# Altium PCB SJA1105Q_LAN8870_EVB_revA.PcbDoc (part 3 of 5)
Units mm, origin at the board's own origin, x right, y up, seen from the top; angles counter-clockwise.
Board outline 128 x 110 mm, 6 copper layers (Top Layer, Mid Layer 1, Mid Layer 2, Mid Layer 3, Mid Layer 4, Bottom Layer), stack 1.538 mm thick; 490 components, 327 nets, 1659 pads, 519 vias.
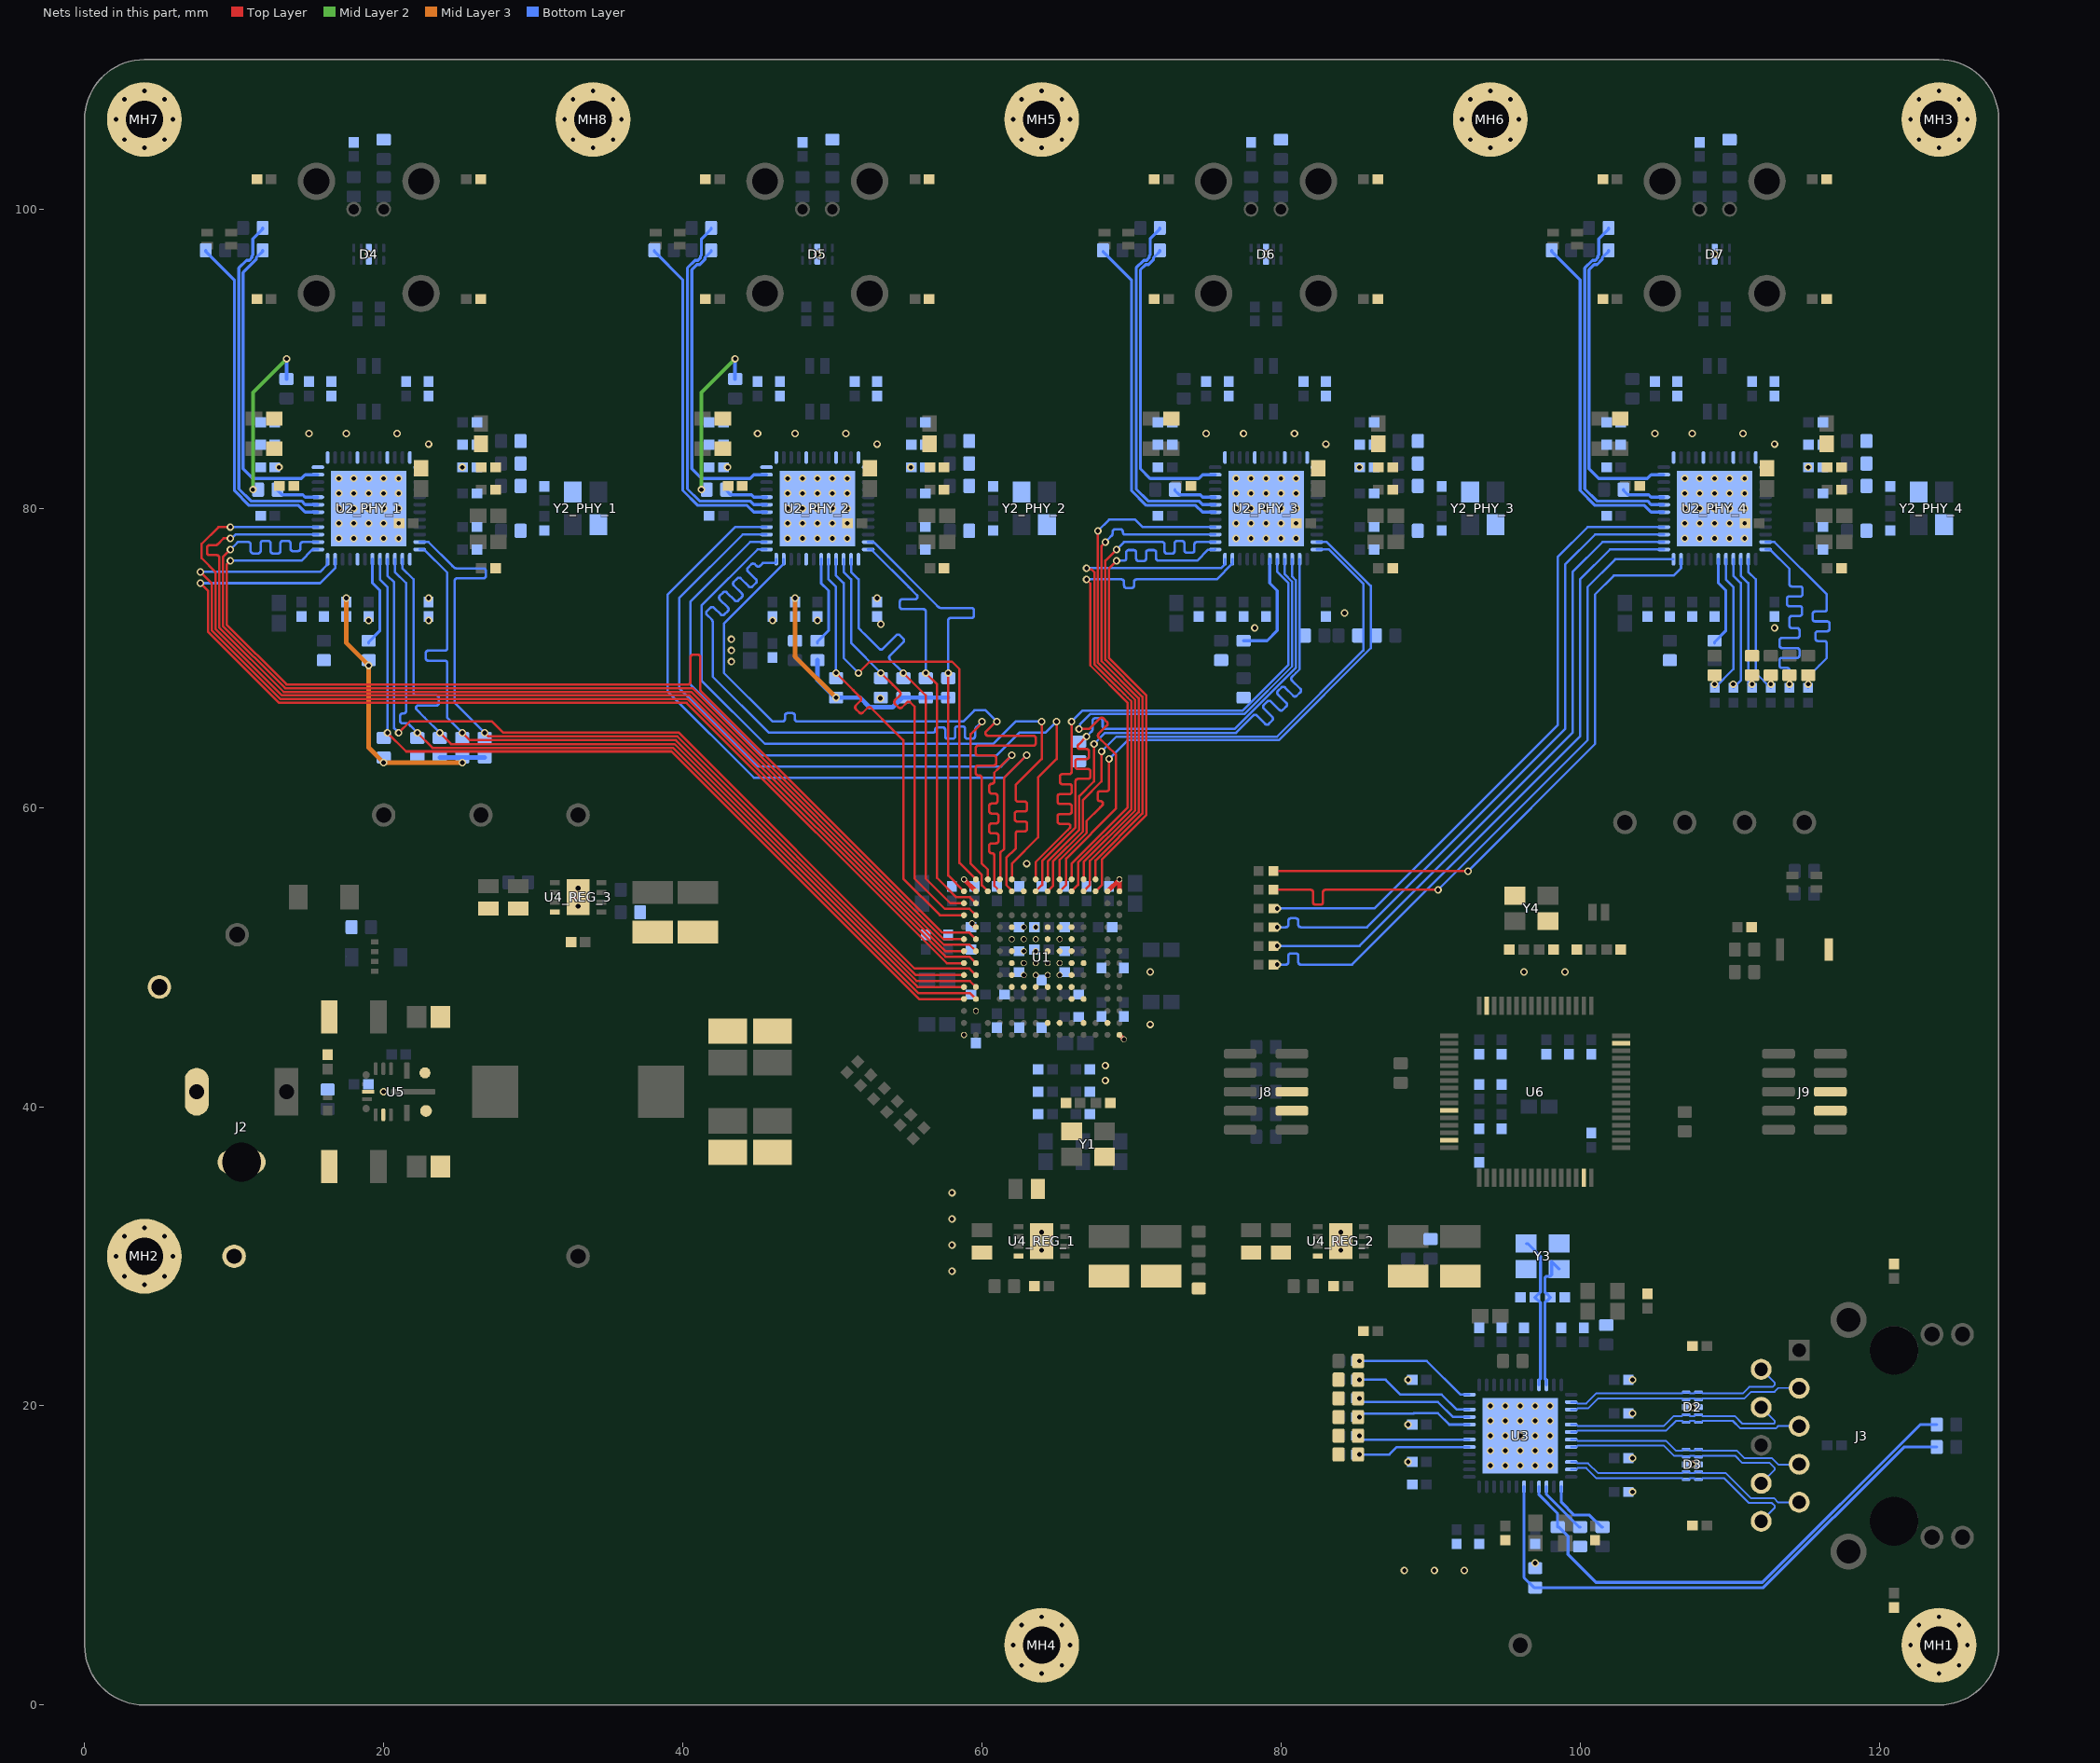
[diagram p7: the nets of this part, all layers, seen from the top]

## Via types
v1: diameter 0.5, hole 0.3, Top Layer to Bottom Layer, tented both sides, 469 vias
v2: diameter 0.4, hole 0.3, Top Layer to Bottom Layer, tented both sides, 44 vias
v3: diameter 0.66, hole 0.33, Top Layer to Bottom Layer, tented both sides, 6 vias

## Nets (pads, with @x,y where several pads share a name; then routed paths per layer and width w, separated by ;. In a path a pad name is that pad's centre, name@x,y a point inside that pad or via, vN(x,y) a via of type N, cw(c..) or ccw(c..) an arc to the next point about the centre after c; other vN are vias at no path point) (continued)
GND: C2.2 C3.2 C4.2 C5.2 C6.2 C7.2 C8.2 C9.2 C10.2 C11.2 C12.2 C13.2 C14.2 C15.2 C16.2 C17.2 C18.2 C19.2 C20.2 C21.2 C22.2 C23.2 C24.2 C25.2 C26.2 C27.2 C28.2 C29.2 C30.2 C31.2 C32.2 C33.2 C34.2 C35.2 C36.2 C37.2 C38.2 C39.2 C40.2 C41.2 C42.2 C43.2 C44.2 C45.2 C46.2 C47.2 C48.2 C49.2 C50.2 C51.2 C52.2 C53.2 C54.2 C55.2 C56.2 C57.2 C58.2 C59.2 C60.2 C61.2 C62.2 C63.2 C66_PHY_1.1 C66_PHY_2.1 C66_PHY_3.1 C66_PHY_4.1 C67_PHY_1.2 C67_PHY_2.2 C67_PHY_3.2 C67_PHY_4.2 C68_PHY_1.2 C68_PHY_2.2 C68_PHY_3.2 C68_PHY_4.2 C69_PHY_1.2 C69_PHY_2.2 C69_PHY_3.2 C69_PHY_4.2 C70_PHY_1.2 C70_PHY_2.2 C70_PHY_3.2 C70_PHY_4.2 C71_PHY_1.2 C71_PHY_2.2 C71_PHY_3.2 C71_PHY_4.2 C72_PHY_1.2 C72_PHY_2.2 C72_PHY_3.2 C72_PHY_4.2 C73_PHY_1.2 C73_PHY_2.2 C73_PHY_3.2 C73_PHY_4.2 C74_PHY_1.2 C74_PHY_2.2 C74_PHY_3.2 C74_PHY_4.2 C75_PHY_1.2 C75_PHY_2.2 C75_PHY_3.2 C75_PHY_4.2 C76_PHY_1.2 C76_PHY_2.2 C76_PHY_3.2 C76_PHY_4.2 C77_PHY_1.2 C77_PHY_2.2 C77_PHY_3.2 C77_PHY_4.2 C78_PHY_1.2 C78_PHY_2.2 C78_PHY_3.2 C78_PHY_4.2 C79_PHY_1.2 C79_PHY_2.2 C79_PHY_3.2 C79_PHY_4.2 C80_PHY_1.2 C80_PHY_2.2 C80_PHY_3.2 C80_PHY_4.2 C81_PHY_1.2 C81_PHY_2.2 C81_PHY_3.2 C81_PHY_4.2 C82_PHY_1.2 C82_PHY_2.2 C82_PHY_3.2 C82_PHY_4.2 C83_PHY_1.2 C83_PHY_2.2 C83_PHY_3.2 C83_PHY_4.2 C84_PHY_1.2 C84_PHY_2.2 C84_PHY_3.2 C84_PHY_4.2 C85_PHY_1.2 C85_PHY_2.2 C85_PHY_3.2 C85_PHY_4.2 C86_PHY_1.2 C86_PHY_2.2 C86_PHY_3.2 C86_PHY_4.2 C87_PHY_1.2 C87_PHY_2.2 C87_PHY_3.2 C87_PHY_4.2 C88_PHY_1.2 C88_PHY_2.2 C88_PHY_3.2 C88_PHY_4.2 C89_PHY_1.2 C89_PHY_2.2 C89_PHY_3.2 C89_PHY_4.2 C90_PHY_1.2 C90_PHY_2.2 C90_PHY_3.2 C90_PHY_4.2 C91_PHY_1.2 C91_PHY_2.2 C91_PHY_3.2 C91_PHY_4.2 C92_PHY_1.2 C92_PHY_2.2 C92_PHY_3.2 C92_PHY_4.2 C93.2 C94.2 C95.2 C96.2 C97.2 C98.2 C99.2 C100.2 C101.2 C102.2 C103.2 C104.2 C105.2 C106.2 C107.2 C108.2 C109.2 C110.2 C111.2 C112.2 C113.2 C114.2 C115_REG_1.2 C115_REG_2.2 C115_REG_3.2 C116_REG_1.2 C116_REG_2.2 C116_REG_3.2 C117_REG_1.2 C117_REG_2.2 C117_REG_3.2 C118_REG_1.2 C118_REG_2.2 C118_REG_3.2 C119_REG_1.2 C119_REG_2.2 C119_REG_3.2 C121.2 C122.2 C123.2 C124.2 C125.2 C126.2 C127.2 C128.2 C129.1 C130.1 C131.2 C132.2 C133.2 C134.2 C135.2 C136.2 C137.2 C138.2 C139.2 C140.2 C141.2 C142.2 C143.2 C144.2 C145.2 C146.2 D2.3 D2.8 D3.3 D3.8 D4.3 D4.8 D5.3 D5.8 D6.3 D6.8 D7.3 D7.8 J1.2 J2.2 J2.3 J8.3 J8.5 J9.3 J9.5 J19.1 MH1.1 MH1.2 MH1.3 MH1.4 MH1.5 MH1.6 MH1.7 MH2.1 MH2.2 MH2.3 MH2.4 MH2.5 MH2.6 MH2.7 MH3.1 MH3.2 MH3.3 MH3.4 MH3.5 MH3.6 MH3.7 MH4.1 MH4.2 MH4.3 MH4.4 MH4.5 MH4.6 MH4.7 MH5.1 MH5.2 MH5.3 MH5.4 MH5.5 MH5.6 MH5.7 MH6.1 MH6.2 MH6.3 MH6.4 MH6.5 MH6.6 MH6.7 MH7.1 MH7.2 MH7.3 MH7.4 MH7.5 MH7.6 MH7.7 MH8.1 MH8.2 MH8.3 MH8.4 MH8.5 MH8.6 MH8.7 R1.1 R13_PHY_1.2 R13_PHY_2.2 R13_PHY_3.2 R13_PHY_4.2 R15_PHY_1.2 R15_PHY_2.2 R15_PHY_3.2 R15_PHY_4.2 R16_PHY_1.2 R16_PHY_2.2 R16_PHY_3.2 R16_PHY_4.2 R26_PHY_1.1 R26_PHY_2.1 R26_PHY_3.1 R26_PHY_4.1 R27_PHY_1.2 R27_PHY_2.2 R27_PHY_3.2 R27_PHY_4.2 R28_PHY_1.2 R28_PHY_2.2 R28_PHY_3.2 R28_PHY_4.2 R29_PHY_1.2 R29_PHY_2.2 R29_PHY_3.2 R29_PHY_4.2 R34.1 R35.1 R36.1 R37.1 R39.1 R41.1 R42.1 R43.2 R46_REG_1.1 R46_REG_2.1 R46_REG_3.1 R47.2 SW1.2 U1.A1 U1.A14 U1.B3 U1.B10 U1.B13 U1.E5 U1.E6 U1.E7 U1.E8 U1.E9 U1.E10 U1.F5 U1.F6 U1.F7 U1.F8 U1.F9 U1.F10 U1.F13 U1.G5 U1.G6 U1.G7 U1.G8 U1.G9 U1.G10 U1.H2 U1.H5 U1.H6 U1.H7 U1.H8 U1.H9 U1.H10 U1.J2 U1.J5 U1.J6 U1.J7 U1.J8 U1.J9 U1.J10 U1.K4 U1.K5 U1.K6 U1.K7 U1.K8 U1.K9 U1.K10 U1.L2 U1.L4 U1.L7 U1.N2 U1.N13 U1.P1 U1.P13 U1.P14 U2_PHY_1.49 U2_PHY_2.49 U2_PHY_3.49 U2_PHY_4.49 U3.49 U4_REG_1.4 U4_REG_1.9 U4_REG_2.4 U4_REG_2.9 U4_REG_3.4 U4_REG_3.9 U5.1 U5.8 U5.12 U5.15 U6.15 U6.27 U6.31 U6.47 U6.63 Y1.2 Y1.4 Y2_PHY_1.2 Y2_PHY_1.4 Y2_PHY_2.2 Y2_PHY_2.4 Y2_PHY_3.2 Y2_PHY_3.4 Y2_PHY_4.2 Y2_PHY_4.4 Y3.2 Y3.4 Y4.2 Y4.4 | length 3.9
  Top Layer w0.3: v2(58.8,55.2) U1.B13@59.6,54.4 ; v2(59.341,52.259) U1.B10@59.6,52 ; U1.N13@68.4,54.4 v2(69.2,55.2) U1.P13@69.2,54.4 ; U1.P1@69.2,44.8 v2(69.5,44.5)
  other v1: 88.25,9 90.25,9 92.25,9 97,9.5 103.5,14.25 94,16 95,16 96,16 97,16 98,16 107.5,16.088 88.5,16.25 103.5,16.5 94,17 95,17 96,17 97,17 98,17 94,18 95,18 96,18 97,18 98,18 88.5,18.75 94,19 95,19 96,19 97,19 98,19 103.5,19.5 107.5,19.912 94,20 95,20 96,20 97,20 98,20 88.5,21.75 103.5,21.75 58,29 58,30.75 58,32.5 58,34.25 20,41 68.25,41.75 68.25,42.75 71.25,45.5 71.25,49 96.25,49 99,49 63,56.25 53.206,67.306 43.25,69.75 43.25,70.5 43.25,71.25 78.25,72 113,72 53.25,72.25 19,72.5 23,72.5 46,72.5 49,72.5 84.25,73 17,78 18,78 19,78 20,78 21,78 47,78 48,78 49,78 50,78 51,78 77,78 78,78 79,78 80,78 81,78 107,78 108,78 109,78 110,78 111,78 17,79 18,79 19,79 20,79 21,79 47,79 48,79 49,79 50,79 51,79 77,79 78,79 79,79 80,79 81,79 107,79 108,79 109,79 110,79 111,79 17,80 18,80 19,80 20,80 21,80 47,80 48,80 49,80 50,80 51,80 77,80 78,80 79,80 80,80 81,80 107,80 108,80 109,80 110,80 111,80 17,81 18,81 19,81 20,81 21,81 47,81 48,81 49,81 50,81 51,81 77,81 78,81 79,81 80,81 81,81 107,81 108,81 109,81 110,81 111,81 17,82 18,82 19,82 20,82 21,82 47,82 48,82 49,82 50,82 51,82 77,82 78,82 79,82 80,82 81,82 107,82 108,82 109,82 110,82 111,82 19,97 49,97 79,97 109,97
  other v2: 58.8,44.8 59.6,46.4 62.8,48.8 63.6,48.8 64.4,48.8 65.2,48.8 62.8,49.6 63.6,49.6 64.4,49.6 65.2,49.6 62.8,50.4 63.6,50.4 62,51.2 62.8,51.2 63.6,51.2 65.2,51.2 62.8,52 63.6,52
  other v3: 64,30.4 84,30.4 64,31.6 84,31.6 33,53.4 33,54.6
LAN8830_ALLPHYAD: R31.2 U3.13 | length 4.5
  Bottom Layer w0.2: U3.13@98.75,14.6 98.75,13.55 99.6,12.7 100.625,12.7 101.425,11.9 R31.2@101.5,11.9
LAN8830_CLK125_EN: R42.2 R64.1 U3.34 | length 8.4
  Bottom Layer w0.156: R64.1@85,21.75 87,21.75 88,20.75 90.75,20.75 91.75,19.75 U3.34@92.6,19.75
  other v1: 85.25,21.75
LAN8830_MODE0: R34.2 R59.1 U3.33 | length 8.1
  Bottom Layer w0.156: R59.1@85,20.5 85.25,20.25 90.5,20.25 91.5,19.25 U3.33@92.6,19.25
  other v1: 85.25,20.5
LAN8830_MODE1: R35.2 R60.1 U3.32 | length 8
  Bottom Layer w0.156: R60.1@85,19.25 85.247,19.497 88.872,19.497 88.875,19.5 90.5,19.5 91.25,18.75 U3.32@92.6,18.75
  other v1: 85.25,19.25
LAN8830_MODE2: R36.2 R61.1 U3.30 | length 7.9
  Bottom Layer w0.156: R61.1@84.845,18.155 85.247,17.753 85.335,17.753 85.338,17.75 U3.30@92.6,17.75
  other v1: 85.25,18
LAN8830_MODE3: R37.2 R62.1 U3.29 | length 7.8
  Bottom Layer w0.156: R62.1@85,16.75 87.25,16.75 87.75,17.25 U3.29@92.6,17.25
  other v1: 85.25,16.75
LAN8830_MODE4: R33.2 R63.1 U3.36 | length 8.5
  Bottom Layer w0.156: R63.1@85,23 89.75,23 92,20.75 U3.36@92.6,20.75
  other v1: 85.25,23
LAN8830_PHYAD0: R3.1 R39.2 U3.18 | length 37.8
  Bottom Layer w0.2: U3.18@96.25,14.6 96.25,8.525 R39.2@96.925,7.85 ; R39.2@97,7.85 112.25,7.85 121.65,17.25 R3.1@123.85,17.25
LAN8830_PHYAD1: R2.1 R32.2 U3.16 | length 35.2
  Bottom Layer w0.2: U3.16@97.25,14.6 97.25,14.05 98.5,12.8 R32.2@98.5,11.9 98.575,11.9 99.188,11.287 99.188,10.062 101.05,8.2 112.191,8.2 122.741,18.75 R2.1@123.85,18.75
LAN8830_PHYAD2: R41.2 U3.15 | length 3.7
  Bottom Layer w0.2: U3.15@97.75,14.6 97.75,14.075 99.925,11.9 R41.2@100,11.9
LAN8830_TXRXA_N: D2.2 D2.9 J3.P3 U3.3 | length 16
  Bottom Layer w0.123: U3.3@99.4,19.75 99.734,19.75 99.823,19.838 100.546,19.838 101.207,20.5 105.925,20.5 106.812,20.5 106.9,20.412 D2.9@107.082,20.412 107.265,20.412 107.353,20.5 107.647,20.5 107.735,20.412 D2.2@107.917,20.412 108.1,20.412 108.188,20.5 111,20.5 111.44,20.94 113.002,20.94 113.257,21.196 114.629,21.196 J3.P3@114.65,21.175
LAN8830_TXRXA_P: D2.1 D2.10 J3.P2 U3.2 | length 15.7
  Bottom Layer w0.123: U3.2@99.4,20.25 99.734,20.25 99.823,20.162 100.412,20.162 101.073,20.823 105.791,20.823 106.812,20.824 106.9,20.912 D2.10@107.082,20.912 107.265,20.912 107.353,20.824 107.647,20.824 107.735,20.912 D2.1@107.917,20.912 108.1,20.912 108.188,20.824 110.866,20.824 111.306,21.264 112.868,21.264 113.029,21.424 113.029,21.526 J3.P2@112.11,22.445
LAN8830_TXRXB_N: D2.5 D2.6 J3.P5 U3.6 | length 16
  Bottom Layer w0.123: U3.6@99.4,18.25 99.734,18.25 99.823,18.338 101.913,18.338 105.747,18.338 106.409,19 106.812,19 106.9,18.912 D2.6@107.082,18.912 107.265,18.912 107.353,19 107.647,19 107.735,18.912 D2.5@107.917,18.912 108.1,18.912 108.188,19 110.209,19 110.721,18.489 113.09,18.489 113.257,18.656 114.629,18.656 J3.P5@114.65,18.635
LAN8830_TXRXB_P: D2.4 D2.7 J3.P4 U3.5 | length 15.7
  Bottom Layer w0.123: U3.5@99.4,18.75 99.734,18.75 99.823,18.662 102.047,18.662 105.613,18.662 106.275,19.324 106.812,19.324 106.9,19.412 D2.7@107.082,19.412 107.265,19.412 107.353,19.324 107.647,19.324 107.735,19.412 D2.4@107.917,19.412 108.1,19.412 108.188,19.324 110.343,19.324 110.854,18.812 112.956,18.812 113.029,18.884 113.029,18.986 J3.P4@112.11,19.905
LAN8830_TXRXC_N: D3.2 D3.9 J3.P8 U3.8 | length 15.8
  Bottom Layer w0.123: U3.8@99.4,17.25 99.734,17.25 99.823,17.338 101.913,17.338 105.613,17.338 106.275,16.676 106.812,16.676 106.9,16.588 D3.9@107.082,16.588 107.265,16.588 107.353,16.676 107.647,16.676 107.735,16.588 D3.2@107.917,16.588 108.1,16.588 108.188,16.676 110.366,16.676 110.851,16.192 112.682,16.192 113.029,15.846 113.029,15.744 J3.P8@112.11,14.825
LAN8830_TXRXC_P: D3.1 D3.10 J3.P7 U3.7 | length 16.1
  Bottom Layer w0.123: U3.7@99.4,17.75 99.734,17.75 99.823,17.662 102.047,17.662 105.747,17.662 106.409,17 106.812,17 106.9,17.088 D3.10@107.082,17.088 107.265,17.088 107.353,17 107.647,17 107.735,17.088 D3.1@107.917,17.088 108.1,17.088 108.188,17 110.5,17 110.985,16.515 112.816,16.515 113.257,16.074 114.629,16.074 J3.P7@114.65,16.095
LAN8830_TXRXD_N: D3.5 D3.6 J3.P10 U3.11 | length 16.3
  Bottom Layer w0.123: U3.11@99.4,15.75 99.734,15.75 99.823,15.838 100.412,15.838 101.073,15.177 105.819,15.177 106.812,15.176 106.9,15.088 D3.6@107.082,15.088 107.265,15.088 107.353,15.176 107.647,15.176 107.735,15.088 D3.5@107.917,15.088 108.1,15.088 108.188,15.176 109.616,15.176 111.28,13.513 112.821,13.513 113.029,13.306 113.029,13.204 J3.P10@112.11,12.285
LAN8830_TXRXD_P: D3.4 D3.7 J3.P9 U3.10 | length 16.5
  Bottom Layer w0.123: U3.10@99.4,16.25 99.734,16.25 99.823,16.162 100.546,16.162 101.207,15.5 105.953,15.5 106.812,15.5 106.9,15.588 D3.7@107.082,15.588 107.265,15.588 107.353,15.5 107.647,15.5 107.735,15.588 D3.4@107.917,15.588 108.1,15.588 108.188,15.5 109.75,15.5 111.414,13.836 112.955,13.836 113.257,13.534 114.629,13.534 J3.P9@114.65,13.555
LAN8830_X25_N: C95.1 U3.45 Y3.3 | length 10.3
  Bottom Layer w0.2: Y3.3@96.4,30.85 96.5,30.85 97.356,29.994 97.356,27.603 97.238,27.486 97.215,27.486 C95.1@96.979,27.25 97.215,27.014 97.238,27.014 97.356,26.897 97.356,21.819 97.25,21.714 U3.45@97.25,21.4
LAN8830_X25_P: C94.1 U3.46 Y3.1 | length 9.7
  Bottom Layer w0.2: U3.46@97.75,21.4 97.75,21.714 97.644,21.819 97.644,26.897 97.762,27.014 97.785,27.014 C94.1@98.021,27.25 97.785,27.486 97.762,27.486 97.644,27.603 97.644,28.547 97.762,28.664 98,28.664 98.1,28.764 98.1,29.65 Y3.1@98.6,29.15
LAN8870_IRQ_PHY_1_N: R23_PHY_1.2 U2_PHY_1.35 | length 20.5
  Bottom Layer w0.2: R23_PHY_1.2@11.9,97.25 11.9,97.175 11.6,96.875 11.595,96.875 11.478,96.758 11.478,96.636 10.6,95.758 10.6,82.65 11.25,82 14.5,82 14.75,82.25 U2_PHY_1.35@15.6,82.25
LAN8870_IRQ_PHY_2_N: R23_PHY_2.2 U2_PHY_2.35 | length 20.6
  Bottom Layer w0.2: R23_PHY_2.2@41.9,97.25 41.9,97.175 41.6,96.875 41.595,96.875 41.478,96.758 41.478,96.636 41.139,96.297 40.947,96.297 40.6,95.95 40.6,82.65 41.25,82 44.5,82 44.75,82.25 U2_PHY_2.35@45.6,82.25
LAN8870_IRQ_PHY_3_N: R23_PHY_3.2 U2_PHY_3.35 | length 20.6
  Bottom Layer w0.2: R23_PHY_3.2@71.9,97.25 71.9,97.175 71.6,96.875 71.595,96.875 71.478,96.758 71.478,96.636 71.139,96.297 70.947,96.297 70.6,95.95 70.6,82.65 71.25,82 74.5,82 74.75,82.25 U2_PHY_3.35@75.6,82.25
LAN8870_IRQ_PHY_4_N: R23_PHY_4.2 U2_PHY_4.35 | length 20.6
  Bottom Layer w0.2: R23_PHY_4.2@101.9,97.25 101.9,97.175 101.6,96.875 101.595,96.875 101.478,96.758 101.478,96.636 101.139,96.297 100.947,96.297 100.6,95.95 100.6,82.65 101.25,82 104.5,82 104.75,82.25 U2_PHY_4.35@105.6,82.25
LAN8870_LED3_PHY_1: R25_PHY_1.2 U2_PHY_1.30 | length 23
  Bottom Layer w0.2: R25_PHY_1.2@8.1,97.25 8.1,97.175 10.022,95.253 10.022,81.178 11,80.2 14.3,80.2 14.75,79.75 U2_PHY_1.30@15.6,79.75
LAN8870_LED3_PHY_2: R25_PHY_2.2 U2_PHY_2.30 | length 23
  Bottom Layer w0.2: R25_PHY_2.2@38.1,97.25 38.1,97.175 40,95.275 40,81.2 41,80.2 44.3,80.2 44.75,79.75 U2_PHY_2.30@45.6,79.75
LAN8870_LED3_PHY_3: R25_PHY_3.2 U2_PHY_3.30 | length 23
  Bottom Layer w0.2: R25_PHY_3.2@68.1,97.175 70,95.275 70,81.2 71,80.2 74.3,80.2 74.75,79.75 U2_PHY_3.30@75.6,79.75
LAN8870_LED3_PHY_4: R25_PHY_4.2 U2_PHY_4.30 | length 23
  Bottom Layer w0.2: R25_PHY_4.2@98.1,97.25 98.1,97.175 100,95.275 100,81.2 101,80.2 104.3,80.2 104.75,79.75 U2_PHY_4.30@105.6,79.75
LAN8870_LINK_LED_PHY_1: R21_PHY_1.2 U2_PHY_1.31 | length 23.9
  Bottom Layer w0.2: R21_PHY_1.2@11.9,98.75 11.9,98.675 11.25,98.025 11.25,96.939 11.189,96.878 11.189,96.755 11.02,96.586 10.828,96.586 10.311,96.07 10.311,81.297 11.12,80.489 14.511,80.489 14.75,80.25 U2_PHY_1.31@15.6,80.25
LAN8870_LINK_LED_PHY_2: R21_PHY_2.2 U2_PHY_2.31 | length 23.9
  Bottom Layer w0.2: R21_PHY_2.2@41.9,98.75 41.9,98.675 41.25,98.025 41.25,96.939 41.189,96.878 41.189,96.755 41.02,96.586 40.828,96.586 40.311,96.07 40.311,81.297 41.12,80.489 44.511,80.489 44.75,80.25 U2_PHY_2.31@45.6,80.25
LAN8870_LINK_LED_PHY_3: R21_PHY_3.2 U2_PHY_3.31 | length 23.9
  Bottom Layer w0.2: R21_PHY_3.2@71.9,98.75 71.9,98.675 71.25,98.025 71.25,96.939 71.189,96.878 71.189,96.755 71.02,96.586 70.828,96.586 70.311,96.07 70.311,81.297 71.12,80.489 74.511,80.489 74.75,80.25 U2_PHY_3.31@75.6,80.25
LAN8870_LINK_LED_PHY_4: R21_PHY_4.2 U2_PHY_4.31 | length 23.9
  Bottom Layer w0.2: R21_PHY_4.2@101.9,98.75 101.9,98.675 101.25,98.025 101.25,96.939 101.189,96.878 101.189,96.755 101.02,96.586 100.828,96.586 100.311,96.07 100.311,81.297 101.12,80.489 104.511,80.489 104.75,80.25 U2_PHY_4.31@105.6,80.25
LAN8870_MODE_STRP_PHY_1: R24_PHY_1.1 U2_PHY_1.18 | length 6.1
  Bottom Layer w0.2: R24_PHY_1.1@19,71 19,71.075 19.75,71.825 19.75,74.5 19.25,75 U2_PHY_1.18@19.25,76.6
LAN8870_MODE_STRP_PHY_2: R24_PHY_2.1 U2_PHY_2.18 | length 6.1
  Bottom Layer w0.2: R24_PHY_2.1@49,71 49,71.075 49.75,71.825 49.75,74.5 49.25,75 U2_PHY_2.18@49.25,76.6
LAN8870_MODE_STRP_PHY_3: R24_PHY_3.1 U2_PHY_3.18 | length 7.5
  Bottom Layer w0.2: R24_PHY_3.1@77.5,71.15 79.075,71.15 79.75,71.825 79.75,74.5 79.25,75 U2_PHY_3.18@79.25,76.6
LAN8870_MODE_STRP_PHY_4: R24_PHY_4.1 U2_PHY_4.18 | length 6.1
  Bottom Layer w0.2: R24_PHY_4.1@109,71 109,71.075 109.75,71.825 109.75,74.5 109.25,75 U2_PHY_4.18@109.25,76.6
LAN8870_RX_CLK_PHY_1: U1.B6 U2_PHY_1.16 | length 57.8
  Top Layer w0.156: v1(21,65) 21.75,65.75 27.25,65.75 28,65 39.735,65 55.502,49.233 59.167,49.233 U1.B6@59.6,48.8
  Bottom Layer w0.156: U2_PHY_1.16@20.25,76.6 20.25,75.5 20.7,75.05 20.7,65.3 v1(21,65)
LAN8870_RX_CLK_PHY_2: U1.B14 U2_PHY_2.16 | length 30
  Top Layer w0.156: v1(51.75,69) 52.5,69.75 58,69.75 58.5,69.25 58.5,56.3 U1.B14@59.6,55.2
  Bottom Layer w0.156: U2_PHY_2.16@50.25,76.6 50.25,75.5 50.75,75 50.75,70 v1(51.75,69)
LAN8870_RX_CLK_PHY_3: U1.J13 U2_PHY_3.16 | length 39.4
  Top Layer w0.156: U1.J13@65.2,54.4 65.633,54.833 65.633,56.592 68.978,59.937 68.978,63.522 68.333,64.167 68.278,64.222 67.808,64.692 cw(c67.925,64.809) 67.808,64.927 68.367,65.486 ccw(c68.249,65.603) 68.367,65.721 68.132,65.956 ccw(c68.014,65.838) 67.897,65.956 67.24,65.299 cw(c67.123,65.416) 67.123,65.25 66.532,65.25 v1(66.5,65.25)
  Bottom Layer w0.156: v1(66.5,65.25) 66.561,65.311 66.561,65.561 67.245,66.245 77.551,66.245 80.745,69.439 80.745,75.102 80.25,75.597 U2_PHY_3.16@80.25,76.6
LAN8870_RX_CLK_PHY_4: R75.2 U2_PHY_4.16 | length 9
  Bottom Layer w0.156: R75.2@110.25,68 110.75,68.5 110.75,75 110.25,75.5 U2_PHY_4.16@110.25,76.6
  other v1: 110.25,68.25
LAN8870_RXCTL_PHY_1: R18_PHY_1.2 U1.A4 U2_PHY_1.17 | length 57.7
  Top Layer w0.156: v1(20.25,65) 21.5,63.75 39.25,63.75 55.8,47.2 U1.A4@58.8,47.2
  Bottom Layer w0.156: U2_PHY_1.17@19.75,76.6 19.75,75.25 20.25,74.75 v1(20.25,65)
LAN8870_RXCTL_PHY_2: R18_PHY_2.2 U1.A11 U2_PHY_2.17 | length 29.7
  Top Layer w0.156: v1(50.25,69) 51.357,67.893 51.413,67.837 51.882,67.368 cw(c51.765,67.25) 51.882,67.133 51.571,66.822 ccw(c51.689,66.704) 51.571,66.587 51.806,66.352 ccw(c51.924,66.469) 52.041,66.352 52.352,66.663 cw(c52.47,66.545) 52.587,66.663 53.32,65.93 53.375,65.875 54.75,64.5 54.75,55.25 57.2,52.8 U1.A11@58.8,52.8
  Bottom Layer w0.156: U2_PHY_2.17@49.75,76.6 49.75,75.25 50.25,74.75 v1(50.25,69)
LAN8870_RXCTL_PHY_3: R18_PHY_3.2 U1.G14 U2_PHY_3.17 | length 39.4
  Top Layer w0.156: U1.G14@63.6,55.2 63.6,56.35 65.747,58.497 65.874,58.624 ccw(c65.756,58.741) 65.756,58.907 65.231,58.907 cw(c65.231,59.073) 65.065,59.073 65.065,59.406 cw(c65.231,59.406) 65.231,59.572 65.852,59.572 ccw(c65.852,59.738) 66.018,59.738 66.018,60.07 ccw(c65.852,60.07) 65.852,60.236 65.231,60.236 cw(c65.231,60.402) 65.065,60.402 65.065,60.735 cw(c65.231,60.735) 65.231,60.901 65.852,60.901 ccw(c65.852,61.067) 66.018,61.067 66.018,61.399 ccw(c65.852,61.399) 65.852,61.565 65.379,61.565 cw(c65.379,61.731) 65.212,61.731 65.212,62.064 cw(c65.379,62.064) 65.379,62.23 65.834,62.23 ccw(c65.834,62.396) 66,62.396 66,62.985 v1(66,65.75)
  Bottom Layer w0.156: v1(66,65.75) 66.741,66.491 77.45,66.491 80.5,69.541 80.5,75 79.75,75.75 U2_PHY_3.17@79.75,76.6
LAN8870_RXCTL_PHY_4: R18_PHY_4.2 R76.2 U2_PHY_4.17 | length 9.3
  Bottom Layer w0.156: R76.2@109,68 110.25,69.25 110.25,74.75 109.75,75.25 U2_PHY_4.17@109.75,76.6
  other v1: 109,68.25
LAN8870_RXD0_PHY_1: R22_PHY_1.1 U1.A6 U2_PHY_1.11 | length 57.6
  Top Layer w0.156: v1(26.75,65) 26.763,65 27.013,64.75 39.638,64.75 55.588,48.8 U1.A6@58.8,48.8
  Bottom Layer w0.156: U2_PHY_1.11@22.4,77.75 23,77.75 24.603,76.147 24.681,76.069 24.683,76.067 ccw(c24.882,76.27) 24.882,75.986 26.665,75.986 cw(c26.665,75.82) 26.832,75.82 26.832,75.488 cw(c26.665,75.488) 26.665,75.321 24.916,75.321 ccw(c24.916,75.155) 24.75,75.155 24.75,74.804 24.75,67 v1(26.75,65)
LAN8870_RXD0_PHY_2: R22_PHY_2.1 U1.A13 U2_PHY_2.11 | length 29.7
  Top Layer w0.156: v1@57.75,68.987 57.75,55.45 U1.A13@58.8,54.4
  Bottom Layer w0.156: U2_PHY_2.11@52.4,77.75 52.725,77.75 52.772,77.703 52.797,77.703 56.999,73.501 57.078,73.422 57.079,73.421 ccw(c57.278,73.623) 57.278,73.339 59.3,73.339 cw(c59.3,73.173) 59.467,73.173 59.467,72.841 cw(c59.3,72.841) 59.3,72.675 57.916,72.675 ccw(c57.916,72.509) 57.75,72.509 57.75,69.75 v1(57.75,69)
LAN8870_RXD0_PHY_3: R22_PHY_3.1 U1.J14 U2_PHY_3.11 | length 39.6
  Top Layer w0.156: U1.J14@65.2,55.2 65.2,56.506 67,58.306 67,59.1 67.917,60.017 68.044,60.144 ccw(c67.926,60.261) 67.926,60.427 67.909,60.427 cw(c67.909,60.593) 67.742,60.593 67.742,60.926 cw(c67.909,60.926) 67.909,61.092 68.334,61.092 ccw(c68.334,61.258) 68.5,61.258 68.5,61.507 v1(68.5,63.25)
  Bottom Layer w0.156: v1(68.5,63.25) 69.75,64.5 79.847,64.5 86,70.653 86,74.813 83.063,77.75 U2_PHY_3.11@82.4,77.75
LAN8870_RXD0_PHY_4: R22_PHY_4.1 R71.2 U2_PHY_4.11 | length 15.5
  Bottom Layer w0.156: U2_PHY_4.11@112.4,77.75 113,77.75 116.5,74.25 116.5,74 116.5,73.265 cw(c116.336,73.265) 116.336,73.101 115.718,73.101 ccw(c115.718,72.937) 115.554,72.937 115.554,72.609 ccw(c115.718,72.609) 115.718,72.445 116.521,72.445 cw(c116.521,72.28) 116.685,72.28 116.685,71.952 cw(c116.521,71.952) 116.521,71.788 115.91,71.788 ccw(c115.91,71.624) 115.746,71.624 115.746,71.296 ccw(c115.91,71.296) 115.91,71.132 116.336,71.132 cw(c116.336,70.967) 116.5,70.967 116.5,70 116,69.5 115.25,68.75 v1(115.25,68.25) R71.2@115.25,68
LAN8870_RXD1_PHY_1: R20_PHY_1.1 U1.B5 U2_PHY_1.12 | length 57.6
  Top Layer w0.156: v1(25.25,65) 25.745,64.505 39.537,64.505 55.641,48.4 59.2,48.4 U1.B5@59.6,48
  Bottom Layer w0.156: U2_PHY_1.12@22.4,77.25 22.7,77.25 24.25,75.7 24.25,71.396 24.25,70.653 cw(c24.084,70.653) 24.084,70.487 22.976,70.487 ccw(c22.976,70.321) 22.81,70.321 22.81,69.989 ccw(c22.976,69.989) 22.976,69.823 24.084,69.823 cw(c24.084,69.656) 24.25,69.656 24.25,68.618 24.25,66 v1(25.25,65)
LAN8870_RXD1_PHY_2: R20_PHY_2.1 U1.B12 U2_PHY_2.12 | length 29.7
  Top Layer w0.156: v1(56.25,69) 56.25,68.987 57,68.237 57,55.291 58.291,54 59.2,54 U1.B12@59.6,53.6
  Bottom Layer w0.156: U2_PHY_2.12@52.4,77.25 52.675,77.25 52.718,77.207 52.718,77.137 55.105,74.75 55.647,74.208 cw(c55.529,74.09) 55.529,73.924 54.68,73.924 ccw(c54.68,73.758) 54.514,73.758 54.514,73.426 ccw(c54.68,73.426) 54.68,73.26 56.084,73.26 cw(c56.084,73.094) 56.25,73.094 56.25,72.776 v1(56.25,69)
LAN8870_RXD1_PHY_3: R20_PHY_3.1 U1.H13 U2_PHY_3.12 | length 39.6
  Top Layer w0.156: U1.H13@64.4,54.4 64.767,54.767 64.767,56.42 66.755,58.408 66.755,60.505 68,61.75 v1(68,63.75)
  Bottom Layer w0.156: v1(68,63.75) 68.995,64.745 79.745,64.745 85.5,70.5 85.5,74.966 83.216,77.25 U2_PHY_3.12@82.4,77.25
LAN8870_RXD1_PHY_4: R20_PHY_4.1 R72.2 U2_PHY_4.12 | length 17.9
  Bottom Layer w0.156: U2_PHY_4.12@112.4,77.25 112.7,77.25 114,75.95 114,75.017 114,74.939 ccw(c114.164,74.939) 114.164,74.775 114.718,74.775 cw(c114.718,74.611) 114.882,74.611 114.882,74.283 cw(c114.718,74.283) 114.718,74.118 113.996,74.118 ccw(c113.996,73.954) 113.832,73.954 113.832,73.626 ccw(c113.996,73.626) 113.996,73.462 114.676,73.462 cw(c114.676,73.298) 114.84,73.298 114.84,72.97 cw(c114.676,72.97) 114.676,72.805 114.164,72.805 ccw(c114.164,72.641) 114,72.641 114,72.25 114,72.24 114,72.162 ccw(c114.166,72.162) 114.166,71.995 114.504,71.995 cw(c114.504,71.829) 114.67,71.829 114.67,71.497 cw(c114.504,71.497) 114.504,71.331 113.5,71.331 ccw(c113.5,71.165) 113.334,71.165 113.334,70.833 ccw(c113.5,70.833) 113.5,70.666 114.504,70.666 cw(c114.504,70.5) 114.67,70.5 114.67,70.168 cw(c114.504,70.168) 114.504,70.002 113.5,70.002 ccw(c113.5,69.836) 113.334,69.836 113.334,69.504 ccw(c113.5,69.504) 113.5,69.337 113.834,69.337 cw(c113.834,69.171) 114,69.171 114,68.375 R72.2@114,68
  other v1: 114,68.25
LAN8870_RXD2_PHY_1: R19_PHY_1.1 U1.A5 U2_PHY_1.14 | length 57.6
  Top Layer w0.156: v1(23.75,65) 24.509,64.241 39.453,64.241 55.694,48 U1.A5@58.8,48
  Bottom Layer w0.156: U2_PHY_1.14@21.25,76.6 21.25,76 22,75.25 22,69.31 22,67.656 ccw(c22.166,67.656) 22.166,67.49 23.525,67.49 cw(c23.525,67.324) 23.691,67.324 23.691,66.992 cw(c23.525,66.992) 23.525,66.826 22.325,66.826 ccw(c22.325,66.66) 22.208,66.542 22.75,66 v1(23.75,65)
LAN8870_RXD2_PHY_2: R19_PHY_2.1 U1.A12 U2_PHY_2.14 | length 29.6
  Top Layer w0.156: v1(54.75,69) 56.25,67.5 56.25,55.25 57.9,53.6 U1.A12@58.8,53.6
  Bottom Layer w0.156: U2_PHY_2.14@51.25,76.6 51.25,75.75 51.75,75.25 51.75,72 52.135,71.615 52.191,71.559 53.14,70.61 ccw(c53.257,70.728) 53.375,70.61 54.281,71.517 cw(c54.399,71.399) 54.516,71.517 54.751,71.282 cw(c54.634,71.165) 54.751,71.047 53.845,70.14 ccw(c53.962,70.023) 53.845,69.905 54.314,69.436 54.37,69.38 v1(54.75,69)
LAN8870_RXD2_PHY_3: R19_PHY_3.1 U1.H14 U2_PHY_3.14 | length 39.4
  Top Layer w0.156: U1.H14@64.4,55.2 64.4,56.4 66.509,58.509 66.509,60.759 67.5,61.75 v1(67.5,64.25)
  Bottom Layer w0.156: v1(67.5,64.25) 68.241,64.991 76.991,64.991 77.625,65.625 78.15,66.15 cw(c78.268,66.033) 78.385,66.15 78.948,65.588 ccw(c79.065,65.705) 79.182,65.588 79.417,65.823 ccw(c79.3,65.94) 79.417,66.058 78.855,66.62 cw(c78.972,66.738) 78.855,66.855 79.09,67.09 cw(c79.207,66.972) 79.325,67.09 79.887,66.528 ccw(c80.005,66.645) 80.122,66.528 80.357,66.763 ccw(c80.24,66.88) 80.357,66.997 79.795,67.56 cw(c79.912,67.677) 79.795,67.795 80.03,68.03 cw(c80.147,67.912) 80.265,68.03 80.821,67.473 ccw(c80.939,67.59) 81.056,67.473 81.291,67.708 ccw(c81.174,67.825) 81.291,67.943 80.735,68.5 cw(c80.852,68.617) 80.735,68.735 81,69 81.25,69.25 U2_PHY_3.14@81.25,76.6
LAN8870_RXD2_PHY_4: R19_PHY_4.1 R73.2 U2_PHY_4.14 | length 9.2
  Bottom Layer w0.156: U2_PHY_4.14@111.25,76.6 111.25,75.75 111.75,75.25 111.75,69 R73.2@112.75,68
  other v1: 112.75,68.25
LAN8870_RXD3_PHY_1: R26_PHY_1.2 U1.B4 U2_PHY_1.15 | length 57.6
  Top Layer w0.156: v1(22.25,65) 23.255,63.995 39.352,63.995 55.747,47.6 59.2,47.6 U1.B4@59.6,47.2
  Bottom Layer w0.156: U2_PHY_1.15@20.75,76.6 20.75,75.75 21.5,75 21.5,66.882 21.5,66.456 cw(c21.334,66.456) 21.334,66.29 21.266,66.29 ccw(c21.266,66.124) 21.099,66.124 21.099,65.792 ccw(c21.266,65.792) 21.266,65.626 21.507,65.626 cw(c21.507,65.342) 21.708,65.542 21.786,65.464 v1(22.25,65)
LAN8870_RXD3_PHY_2: R26_PHY_2.2 U1.B11 U2_PHY_2.15 | length 29.7
  Top Layer w0.156: v1(53.25,69) 53.993,68.257 54.049,68.201 54.519,67.731 cw(c54.401,67.614) 54.519,67.497 54.189,67.167 ccw(c54.306,67.049) 54.189,66.932 54.424,66.697 ccw(c54.541,66.814) 54.658,66.697 54.988,67.027 cw(c55.106,66.909) 55.223,67.027 55.5,66.75 55.5,66.241 55.5,55.25 57.517,53.233 59.167,53.233 U1.B11@59.6,52.8
  Bottom Layer w0.156: U2_PHY_2.15@50.75,76.6 50.75,75.75 51.25,75.25 51.25,71 v1(53.25,69)
LAN8870_RXD3_PHY_3: R26_PHY_3.2 U1.G13 U2_PHY_3.15 | length 39.3
  Top Layer w0.156: U1.G13@63.6,54.4 64.033,54.833 64.033,56.436 66.264,58.667 66.264,61.01 66.264,61.752 cw(c66.43,61.752) 66.43,61.919 67.088,61.919 ccw(c67.088,62.085) 67.255,62.085 67.255,62.417 ccw(c67.088,62.417) 67.088,62.583 66.412,62.583 cw(c66.412,62.749) 66.245,62.749 66.245,63.081 cw(c66.412,63.081) 66.412,63.248 66.996,63.248 ccw(c66.996,63.414) 67.162,63.414 67.162,63.746 ccw(c66.996,63.746) 66.996,63.912 66.563,63.912 cw(c66.563,64.078) 66.446,64.196 66.989,64.739 v1(67,64.75)
  Bottom Layer w0.156: v1(67,64.75) 67.25,65 67.328,65.078 ccw(c67.128,65.279) 67.411,65.279 67.411,65.8 cw(c67.577,65.8) 67.577,65.966 67.91,65.966 cw(c67.91,65.8) 68.076,65.8 68.076,65.416 ccw(c68.242,65.416) 68.242,65.25 68.734,65.25 76.903,65.25 80.991,69.338 80.991,75.203 80.75,75.444 U2_PHY_3.15@80.75,76.6
LAN8870_RXD3_PHY_4: R26_PHY_4.2 R74.2 U2_PHY_4.15 | length 8.9
  Bottom Layer w0.156: U2_PHY_4.15@110.75,76.6 110.75,75.5 111.25,75 111.25,68.338 111.253,68.335 111.253,68.247 R74.2@111.5,68
  other v1: 111.5,68.25
LAN8870_SPEED_SEL_PHY_1: R17_PHY_1.1 U2_PHY_1.32 | length 2.9
  Bottom Layer w0.2: R17_PHY_1.1@12.9,81.25 12.9,81.2 13.2,80.9 14.6,80.9 14.75,80.75 U2_PHY_1.32@15.6,80.75
LAN8870_SPEED_SEL_PHY_2: R17_PHY_2.1 U2_PHY_2.32 | length 2.9
  Bottom Layer w0.2: R17_PHY_2.1@42.9,81.25 42.9,81.2 43.2,80.9 44.6,80.9 44.75,80.75 U2_PHY_2.32@45.6,80.75
LAN8870_SPEED_SEL_PHY_3: R17_PHY_3.1 U2_PHY_3.32 | length 2.9
  Bottom Layer w0.2: R17_PHY_3.1@72.9,81.25 72.9,81.2 73.2,80.9 74.6,80.9 74.75,80.75 U2_PHY_3.32@75.6,80.75
LAN8870_SPEED_SEL_PHY_4: R17_PHY_4.1 U2_PHY_4.32 | length 2.9
  Bottom Layer w0.2: R17_PHY_4.1@102.9,81.25 102.9,81.2 103.2,80.9 104.6,80.9 104.75,80.75 U2_PHY_4.32@105.6,80.75
LAN8870_TX_CLK_PHY_1: U1.A7 U2_PHY_1.23 | length 73.2
  Top Layer w0.156: v1(7.75,75) 8.25,74.5 8.25,71.75 13,67 40.25,67 57.65,49.6 U1.A7@58.8,49.6
  Bottom Layer w0.156: v1(7.75,75) 15.75,75 16.75,76 U2_PHY_1.23@16.75,76.6
LAN8870_TX_CLK_PHY_2: U1.C14 U2_PHY_2.23 | length 51.2
  Top Layer w0.156: U1.C14@60.4,55.2 60.4,55.85 60,56.25 60,61.899 60,61.977 ccw(c59.834,61.977) 59.834,62.143 59.748,62.143 cw(c59.748,62.309) 59.582,62.309 59.582,62.642 cw(c59.748,62.642) 59.748,62.808 60.795,62.808 ccw(c60.795,62.974) 60.961,62.974 60.961,63.306 ccw(c60.795,63.306) 60.795,63.472 59.748,63.472 cw(c59.748,63.638) 59.582,63.638 59.582,63.971 cw(c59.748,63.971) 59.748,64.137 63.437,64.137 ccw(c63.437,64.303) 63.603,64.303 63.603,64.635 ccw(c63.437,64.635) 63.437,64.801 60.402,64.801 cw(c60.402,64.967) 60.285,65.085 v1@61,65.8
  Bottom Layer w0.156: U2_PHY_2.23@46.75,76.6 46.75,76.3 42.75,72.3 42.75,69 46,65.75 46.4,65.75 46.663,65.75 ccw(c46.663,65.916) 46.829,65.916 46.829,66.14 cw(c46.995,66.14) 46.995,66.306 47.327,66.306 cw(c47.327,66.14) 47.493,66.14 47.493,65.916 ccw(c47.66,65.916) 47.66,65.75 48.402,65.75 58.75,65.75 59.5,66.5 60.25,66.5 v1(61,65.75)
LAN8870_TX_CLK_PHY_3: U1.K14 U2_PHY_3.23 | length 34.1
  Top Layer w0.156: U1.K14@66,55.2 66,56.25 69.75,60 69.75,67 67.25,69.5 67.25,74.987 67,75.237 v1(67,75.25)
  Bottom Layer w0.156: v1(67,75.25) 68.6,75.25 69.343,75.25 cw(c69.343,75.084) 69.509,75.084 69.509,74.846 ccw(c69.675,74.846) 69.675,74.68 70.007,74.68 ccw(c70.007,74.846) 70.173,74.846 70.173,75.084 cw(c70.34,75.084) 70.34,75.25 70.6,75.25 75.7,75.25 76.75,76.3 U2_PHY_3.23@76.75,76.6
LAN8870_TX_CLK_PHY_4: R69.2 U2_PHY_4.23 | length 42.1
  Top Layer w0.156: R69.2@79.5,55.75 v1(92.5,55.75)
  Bottom Layer w0.156: v1(92.5,55.75) 101,64.25 101,74.25 102.25,75.5 106.25,75.5 106.75,76 U2_PHY_4.23@106.75,76.6
LAN8870_TX_CTL_PHY_1: U1.B7 U2_PHY_1.24 | length 73.6
  Top Layer w0.156: v1(7.75,75.75) 8.495,75.005 8.495,71.852 13.102,67.245 40.352,67.245 57.564,50.033 59.167,50.033 U1.B7@59.6,49.6
  Bottom Layer w0.156: v1(7.75,75.75) 15.75,75.75 16.203,76.203 16.203,76.228 16.25,76.275 U2_PHY_1.24@16.25,76.6
LAN8870_TX_CTL_PHY_2: U1.C13 U2_PHY_2.24 | length 51.3
  Top Layer w0.156: v1(60,65.75) 60,65.657 59.25,64.907 59.25,56.25 60,55.5 60,54.8 U1.C13@60.4,54.4
  Bottom Layer w0.156: U2_PHY_2.24@46.25,76.6 46.25,76.395 46.207,76.352 46.148,76.352 45.352,76.352 45.158,76.158 cw(c45.041,76.276) 44.923,76.158 44.819,76.262 ccw(c44.702,76.144) 44.585,76.262 44.35,76.027 ccw(c44.467,75.909) 44.35,75.792 44.892,75.25 cw(c44.774,75.133) 44.892,75.015 44.657,74.78 cw(c44.539,74.898) 44.422,74.78 43.88,75.322 ccw(c43.762,75.205) 43.645,75.322 43.41,75.087 ccw(c43.527,74.97) 43.41,74.852 43.952,74.31 cw(c43.834,74.193) 43.952,74.075 43.717,73.84 cw(c43.599,73.958) 43.482,73.84 42.94,74.382 ccw(c42.823,74.265) 42.705,74.382 42.47,74.147 ccw(c42.588,74.03) 42.47,73.912 43.012,73.371 cw(c42.895,73.253) 43.012,73.136 42.777,72.901 cw(c42.66,73.018) 42.542,72.901 42.083,73.36 ccw(c41.965,73.243) 41.848,73.36 41.613,73.125 ccw(c41.73,73.008) 41.613,72.89 41.917,72.586 cw(c41.716,72.386) 42,72.386 42,72.275 42,68.75 45.75,65 53.2,65 56.714,65 ccw(c56.714,65.166) 56.881,65.166 56.881,65.201 cw(c57.047,65.201) 57.047,65.367 57.379,65.367 cw(c57.379,65.201) 57.545,65.201 57.545,64.759 ccw(c57.711,64.759) 57.711,64.593 58.043,64.593 ccw(c58.043,64.759) 58.21,64.759 58.21,65.256 cw(c58.376,65.256) 58.376,65.422 58.708,65.422 cw(c58.708,65.256) 58.874,65.256 58.874,64.759 ccw(c59.04,64.759) 59.04,64.593 59.372,64.593 ccw(c59.372,64.759) 59.539,64.759 59.539,65.171 cw(c59.822,65.171) 59.622,65.372 59.7,65.45 v1(60,65.75)
LAN8870_TX_CTL_PHY_3: U1.K13 U2_PHY_3.24 | length 34.3
  Top Layer w0.156: U1.K13@66,54.4 66.433,54.833 66.433,56.336 69.995,59.898 69.995,67.102 69.745,67.352 69.495,67.602 69.018,68.079 67.518,69.579 67.518,75.732 67.316,75.934 67.066,75.934 v1(67,76)
  Bottom Layer w0.156: v1(67,76) 76,76 76.203,76.203 76.203,76.228 76.25,76.275 U2_PHY_3.24@76.25,76.6
LAN8870_TX_CTL_PHY_4: R70.2 U2_PHY_4.24 | length 43.6
  Top Layer w0.156: R70.2@79.5,54.5 81.235,54.5 81.978,54.5 cw(c81.978,54.334) 82.144,54.334 82.144,53.67 ccw(c82.31,53.67) 82.31,53.504 82.642,53.504 ccw(c82.642,53.67) 82.808,53.67 82.808,54.334 cw(c82.974,54.334) 82.974,54.5 83.765,54.5 v1(90.5,54.5)
  Bottom Layer w0.156: v1(90.5,54.5) 100.5,64.5 100.5,74.75 102.35,76.6 U2_PHY_4.24@106.25,76.6
LAN8870_TXD0_PHY_1: U1.B9 U2_PHY_1.25 | length 73.3
  Top Layer w0.156: v1(9.75,76.5) 9.75,76.487 9.5,76.237 9.5,72.235 13.508,68.227 39.493,68.227 40.344,68.227 ccw(c40.344,68.393) 40.51,68.393 40.51,70.048 cw(c40.677,70.048) 40.677,70.214 41.009,70.214 cw(c41.009,70.048) 41.175,70.048 41.175,67.879 ccw(c41.341,67.879) 41.224,67.762 42.25,66.735 57.352,51.633 59.167,51.633 U1.B9@59.6,51.2
  Bottom Layer w0.156: v1(9.75,76.5) 14.5,76.5 15.203,77.203 15.228,77.203 15.275,77.25 U2_PHY_1.25@15.6,77.25
LAN8870_TXD0_PHY_2: U1.E13 U2_PHY_2.25 | length 51.2
  Top Layer w0.156: U1.E13@62,54.4 62,54.455 61.633,54.822 61.633,56.633 62.25,57.25 62.25,57.499 62.25,58.242 cw(c62.416,58.242) 62.416,58.408 62.857,58.408 ccw(c62.857,58.574) 63.023,58.574 63.023,58.906 ccw(c62.857,58.906) 62.857,59.072 62.356,59.072 cw(c62.356,59.239) 62.19,59.239 62.19,59.571 cw(c62.356,59.571) 62.356,59.737 62.857,59.737 ccw(c62.857,59.903) 63.023,59.903 63.023,60.235 ccw(c62.857,60.235) 62.857,60.401 62.416,60.401 cw(c62.416,60.568) 62.25,60.568 62.25,61.25 62.25,61.5 64,63.25 v1(64,65.75)
  Bottom Layer w0.156: U2_PHY_2.25@45.6,77.25 45,77.25 41.25,73.5 41.25,68.5 45.5,64.25 60.75,64.25 62.25,65.75 v1(64,65.75)
LAN8870_TXD0_PHY_3: U1.M13 U2_PHY_3.25 | length 34
  Top Layer w0.156: U1.M13@67.6,54.4 68.033,54.833 68.033,56.548 70.977,59.492 70.977,67.508 68.5,69.985 68.5,70.115 68.5,76 v1(69,76.5)
  Bottom Layer w0.156: v1(69,76.5) 69.409,76.5 69.488,76.5 ccw(c69.488,76.666) 69.654,76.666 69.654,77.047 cw(c69.82,77.047) 69.82,77.213 70.152,77.213 cw(c70.152,77.047) 70.318,77.047 70.318,76.646 ccw(c70.484,76.646) 70.484,76.48 70.817,76.48 ccw(c70.817,76.646) 70.983,76.646 70.983,77.047 cw(c71.149,77.047) 71.149,77.213 71.481,77.213 cw(c71.481,77.047) 71.647,77.047 71.647,76.666 ccw(c71.813,76.666) 71.813,76.5 72.248,76.5 74.4,76.5 75.132,77.232 75.582,77.232 U2_PHY_3.25@75.6,77.25
LAN8870_TXD0_PHY_4: R65.2 U2_PHY_4.25 | length 44.7
  Bottom Layer w0.156: v1(79.75,49.5) 80.25,49.5 80.328,49.5 ccw(c80.328,49.666) 80.494,49.666 80.494,50.088 cw(c80.661,50.088) 80.661,50.254 80.993,50.254 cw(c80.993,50.088) 81.159,50.088 81.159,49.666 ccw(c81.325,49.666) 81.325,49.5 81.744,49.5 84.75,49.5 100,64.75 100,75.25 102,77.25 U2_PHY_4.25@105.6,77.25
LAN8870_TXD1_PHY_1: U1.A9 U2_PHY_1.26 | length 73.3
  Top Layer w0.156: v1(9.75,77.25) 9.25,76.75 9.25,72.138 13.407,67.982 40.657,67.982 57.438,51.2 U1.A9@58.8,51.2
  Bottom Layer w0.156: v1(9.75,77.25) 10.195,77.695 10.25,77.75 10.938,77.75 cw(c10.938,77.584) 11.104,77.584 11.104,77.156 ccw(c11.27,77.156) 11.27,76.99 11.603,76.99 ccw(c11.603,77.156) 11.769,77.156 11.769,77.664 cw(c11.935,77.664) 11.935,77.83 12.267,77.83 cw(c12.267,77.664) 12.433,77.664 12.433,77.156 ccw(c12.599,77.156) 12.599,76.99 12.932,76.99 ccw(c12.932,77.156) 13.098,77.156 13.098,77.664 cw(c13.264,77.664) 13.264,77.83 13.596,77.83 cw(c13.596,77.664) 13.762,77.664 13.762,77.311 ccw(c13.928,77.311) 13.928,77.145 14.261,77.145 ccw(c14.261,77.311) 14.427,77.311 14.427,77.584 cw(c14.593,77.584) 14.593,77.75 14.896,77.75 U2_PHY_1.26@15.6,77.75
LAN8870_TXD1_PHY_2: U1.E14 U2_PHY_2.26 | length 51.4
  Top Layer w0.156: U1.E14@62,55.2 62,56.25 63.75,58 63.75,62 65,63.25 v1(65,65.75)
  Bottom Layer w0.156: U2_PHY_2.26@45.6,77.75 44.5,77.75 40.5,73.75 40.5,68.25 45.25,63.5 61,63.5 62.5,65 64.25,65 v1(65,65.75)
LAN8870_TXD1_PHY_3: U1.M14 U2_PHY_3.26 | length 34.1
  Top Layer w0.156: U1.M14@67.6,55.2 67.6,56.462 70.732,59.593 70.732,67.407 68.255,69.884 68.255,75.352 68.255,76.505 v1(69,77.25)
  Bottom Layer w0.156: v1(69,77.25) 69.5,77.75 71.306,77.75 72.049,77.75 cw(c72.049,77.584) 72.215,77.584 72.215,77.139 ccw(c72.381,77.139) 72.381,76.973 72.714,76.973 ccw(c72.714,77.139) 72.88,77.139 72.88,77.654 cw(c73.046,77.654) 73.046,77.82 73.378,77.82 cw(c73.378,77.654) 73.544,77.654 73.544,77.195 ccw(c73.71,77.195) 73.71,77.029 74.043,77.029 ccw(c74.043,77.195) 74.209,77.195 74.209,77.584 cw(c74.375,77.584) 74.375,77.75 U2_PHY_3.26@75.6,77.75
LAN8870_TXD1_PHY_4: R66.2 U2_PHY_4.26 | length 43.3
  Bottom Layer w0.156: v1(79.75,50.75) 85.25,50.75 99.5,65 99.5,75.75 101.5,77.75 U2_PHY_4.26@105.6,77.75
LAN8870_TXD2_PHY_1: U1.B8 U2_PHY_1.27 | length 73.4
  Top Layer w0.156: v1(9.75,78) 9.3,78 9.286,77.986 8.887,77.587 cw(c8.769,77.704) 8.769,77.538 8.349,77.538 ccw(c8.349,77.372) 8.183,77.372 8.183,77.04 ccw(c8.349,77.04) 8.349,76.873 8.834,76.873 cw(c8.834,76.707) 9,76.707 9,75.3 9,72.041 13.305,67.736 40.555,67.736 57.458,50.833 59.167,50.833 U1.B8@59.6,50.4
  Bottom Layer w0.156: v1(9.75,78) 9.843,78 10.093,78.25 U2_PHY_1.27@15.6,78.25
LAN8870_TXD2_PHY_2: U1.D13 U2_PHY_2.27 | length 51.2
  Top Layer w0.156: U1.D13@61.189,54.411 60.833,54.767 60.833,56.7 60.833,56.778 ccw(c60.667,56.778) 60.667,56.945 60.657,56.945 cw(c60.657,57.111) 60.491,57.111 60.491,57.443 cw(c60.657,57.443) 60.657,57.609 60.944,57.609 ccw(c60.944,57.775) 61.11,57.775 61.11,58.107 ccw(c60.944,58.107) 60.944,58.274 60.657,58.274 cw(c60.657,58.44) 60.491,58.44 60.491,58.772 cw(c60.657,58.772) 60.657,58.938 60.944,58.938 ccw(c60.944,59.104) 61.11,59.104 61.11,59.436 ccw(c60.944,59.436) 60.944,59.603 60.657,59.603 cw(c60.657,59.769) 60.491,59.769 60.491,60.101 cw(c60.657,60.101) 60.657,60.267 60.872,60.267 ccw(c60.872,60.433) 61.038,60.433 61.038,60.765 ccw(c60.872,60.765) 60.872,60.932 60.667,60.932 cw(c60.667,61.098) 60.501,61.098 60.501,61.43 cw(c60.667,61.43) 60.667,61.596 ccw(c60.667,61.762) 60.833,61.762 60.833,62.333 61.1,62.6 v1(62,63.5)
  Bottom Layer w0.156: U2_PHY_2.27@45.6,78.25 44,78.25 39.75,74 39.75,68 45,62.75 61.291,62.75 62,63.459 v1(62,63.5)
LAN8870_TXD2_PHY_3: U1.L13 U2_PHY_3.27 | length 34.1
  Top Layer w0.156: U1.L13@66.8,54.4 67.233,54.833 67.233,56.442 70.486,59.695 70.486,67.305 68.009,69.782 68.009,76.106 68.009,77.487 68.25,77.727 v1(68.25,77.75)
  Bottom Layer w0.156: v1(68.25,77.75) 68.592,78.092 68.67,78.17 ccw(c68.47,78.371) 68.753,78.371 68.753,78.445 cw(c68.919,78.445) 68.919,78.612 69.252,78.612 cw(c69.252,78.445) 69.418,78.445 69.418,78.416 ccw(c69.584,78.416) 69.584,78.25 70.005,78.25 U2_PHY_3.27@75.6,78.25
LAN8870_TXD2_PHY_4: R67.2 U2_PHY_4.27 | length 44.1
  Bottom Layer w0.156: v1(79.75,52) 80.25,52 80.328,52 ccw(c80.328,52.166) 80.494,52.166 80.494,52.428 cw(c80.661,52.428) 80.661,52.594 80.993,52.594 cw(c80.993,52.428) 81.159,52.428 81.159,52.166 ccw(c81.325,52.166) 81.325,52 81.773,52 85.75,52 99,65.25 99,76.25 101,78.25 U2_PHY_4.27@105.6,78.25
LAN8870_TXD3_PHY_1: U1.A8 U2_PHY_1.28 | length 73.3
  Top Layer w0.156: v1(9.75,78.75) 8.95,78.75 7.823,77.623 7.823,76.677 8.75,75.75 8.75,71.944 13.203,67.491 40.453,67.491 57.544,50.4 U1.A8@58.8,50.4
  Bottom Layer w0.156: v1(9.75,78.75) U2_PHY_1.28@15.6,78.75
LAN8870_TXD3_PHY_2: U1.D14 U2_PHY_2.28 | length 51
  Top Layer w0.156: U1.D14@61.2,55.2 61.226,55.226 61.226,56.976 61.5,57.25 61.5,62 v1(63,63.5)
  Bottom Layer w0.156: U2_PHY_2.28@45.6,78.75 43.5,78.75 39,74.25 39,67.75 44.75,62 61.5,62 v1(63,63.5)
LAN8870_TXD3_PHY_3: U1.L14 U2_PHY_3.28 | length 34.1
  Top Layer w0.156: U1.L14@66.8,55.2 66.8,56.356 70.241,59.797 70.241,67.203 67.764,69.68 67.764,78.486 v1(67.75,78.5)
  Bottom Layer w0.156: v1(67.75,78.5) 68.5,79.25 70.25,79.25 70.75,78.75 U2_PHY_3.28@75.6,78.75
LAN8870_TXD3_PHY_4: R68.2 U2_PHY_4.28 | length 43
  Bottom Layer w0.156: v1(79.75,53.25) 86.25,53.25 98.5,65.5 98.5,76.75 100.5,78.75 U2_PHY_4.28@105.6,78.75
LAN8870_VBAT_PHY_1: C87_PHY_1.1 C88_PHY_1.1 FB16_PHY_1.2 U2_PHY_1.1
  other v1: 25.25,82.75
LAN8870_VBAT_PHY_2: C87_PHY_2.1 C88_PHY_2.1 FB16_PHY_2.2 U2_PHY_2.1
  other v1: 55.25,82.75
LAN8870_VBAT_PHY_3: C87_PHY_3.1 C88_PHY_3.1 FB16_PHY_3.2 U2_PHY_3.1
  other v1: 85.25,82.75
LAN8870_VBAT_PHY_4: C87_PHY_4.1 C88_PHY_4.1 FB16_PHY_4.2 U2_PHY_4.1
  other v1: 115.25,82.75
LAN8870_VDDA_PHY_1: C82_PHY_1.1 C83_PHY_1.1 C84_PHY_1.1 C85_PHY_1.1 C86_PHY_1.1 FB11_PHY_1.1 FB15_PHY_1.2 U2_PHY_1.37 U2_PHY_1.41 U2_PHY_1.45 U2_PHY_1.48
  other v1: 23,84.3 15,85 17.5,85 20.9,85
LAN8870_VDDA_PHY_2: C82_PHY_2.1 C83_PHY_2.1 C84_PHY_2.1 C85_PHY_2.1 C86_PHY_2.1 FB11_PHY_2.1 FB15_PHY_2.2 U2_PHY_2.37 U2_PHY_2.41 U2_PHY_2.45 U2_PHY_2.48
  other v1: 53,84.3 45,85 47.5,85 50.9,85
LAN8870_VDDA_PHY_3: C82_PHY_3.1 C83_PHY_3.1 C84_PHY_3.1 C85_PHY_3.1 C86_PHY_3.1 FB11_PHY_3.1 FB15_PHY_3.2 U2_PHY_3.37 U2_PHY_3.41 U2_PHY_3.45 U2_PHY_3.48
  other v1: 83,84.3 75,85 77.5,85 80.9,85
LAN8870_VDDA_PHY_4: C82_PHY_4.1 C83_PHY_4.1 C84_PHY_4.1 C85_PHY_4.1 C86_PHY_4.1 FB11_PHY_4.1 FB15_PHY_4.2 U2_PHY_4.37 U2_PHY_4.41 U2_PHY_4.45 U2_PHY_4.48
  other v1: 113,84.3 105,85 107.5,85 110.9,85
LAN8870_VDDIO_PHY_1: C89_PHY_1.1 C90_PHY_1.1 C91_PHY_1.1 C92_PHY_1.1 FB17_PHY_1.2 R14_PHY_1.1 R17_PHY_1.2 R18_PHY_1.1 R19_PHY_1.2 R20_PHY_1.2 R22_PHY_1.2 R24_PHY_1.2 U2_PHY_1.13 U2_PHY_1.20 U2_PHY_1.36 | length 31.3
  Mid Layer 2 w0.25: v1(11.25,81.25) 11.25,87.75 v1(13.5,90)
  Mid Layer 3 w0.3: v1(17.5,74) 17.5,71 v1(19,69.5) 19,64 v1(20,63) v1(25.25,63)
  Bottom Layer w0.25: R14_PHY_1.1@13.5,88.65 v1(13.5,90)
  Bottom Layer w0.3: R19_PHY_1.2@23.75,63.35 R20_PHY_1.2@25.25,63.35 R22_PHY_1.2@26.75,63.35
  other v1: 23,74 13,82.75
LAN8870_VDDIO_PHY_2: C89_PHY_2.1 C90_PHY_2.1 C91_PHY_2.1 C92_PHY_2.1 FB17_PHY_2.2 R14_PHY_2.1 R17_PHY_2.2 R18_PHY_2.1 R19_PHY_2.2 R20_PHY_2.2 R22_PHY_2.2 R24_PHY_2.2 U2_PHY_2.13 U2_PHY_2.20 U2_PHY_2.36 | length 29.9
  Mid Layer 2 w0.25: v1(41.25,81.25) 41.25,87.75 v1(43.5,90)
  Mid Layer 3 w0.3: v1(47.5,74) 47.5,70.1 v1(50.25,67.35)
  Bottom Layer w0.25: R14_PHY_2.1@43.5,88.65 v1(43.5,90)
  Bottom Layer w0.3: R24_PHY_2.2@49,69.85 49,68.525 50.175,67.35 v1(50.25,67.35) 51.851,67.35 52.49,66.711 54.036,66.711 54.675,67.35 R19_PHY_2.2@54.75,67.35 R20_PHY_2.2@56.25,67.35 R22_PHY_2.2@57.75,67.35
  other v1: 53,74 43,82.75